# Altium PCB PCB1.PcbDoc
Units mil, origin at the board's own origin, x right, y up, seen from the top; angles counter-clockwise.
Board outline 3259.84 x 3858.27 mil, 2 copper layers (Top Layer, Bottom Layer); 9 components, 5 nets, 30 pads, 224 vias.
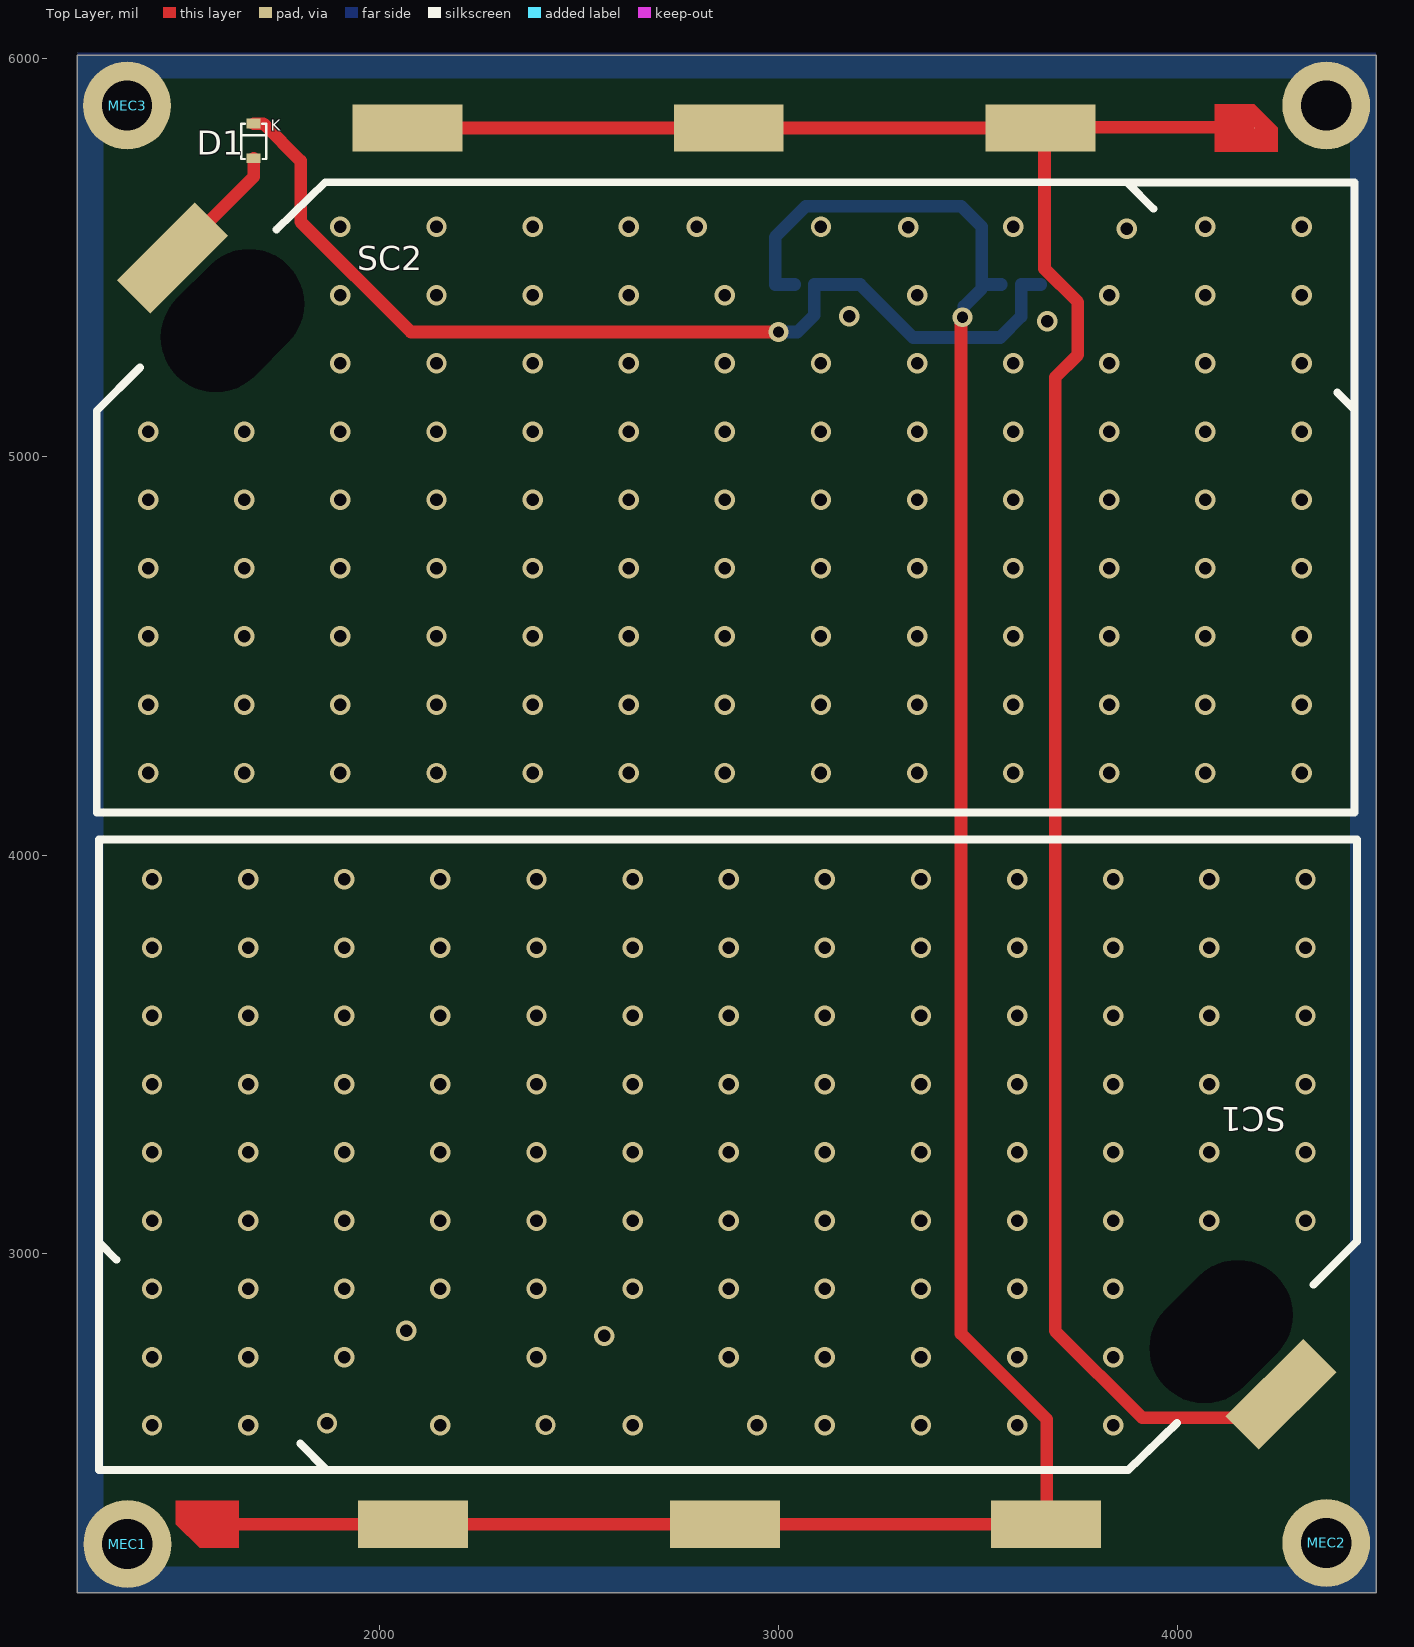
[diagram p0: Top Layer view]
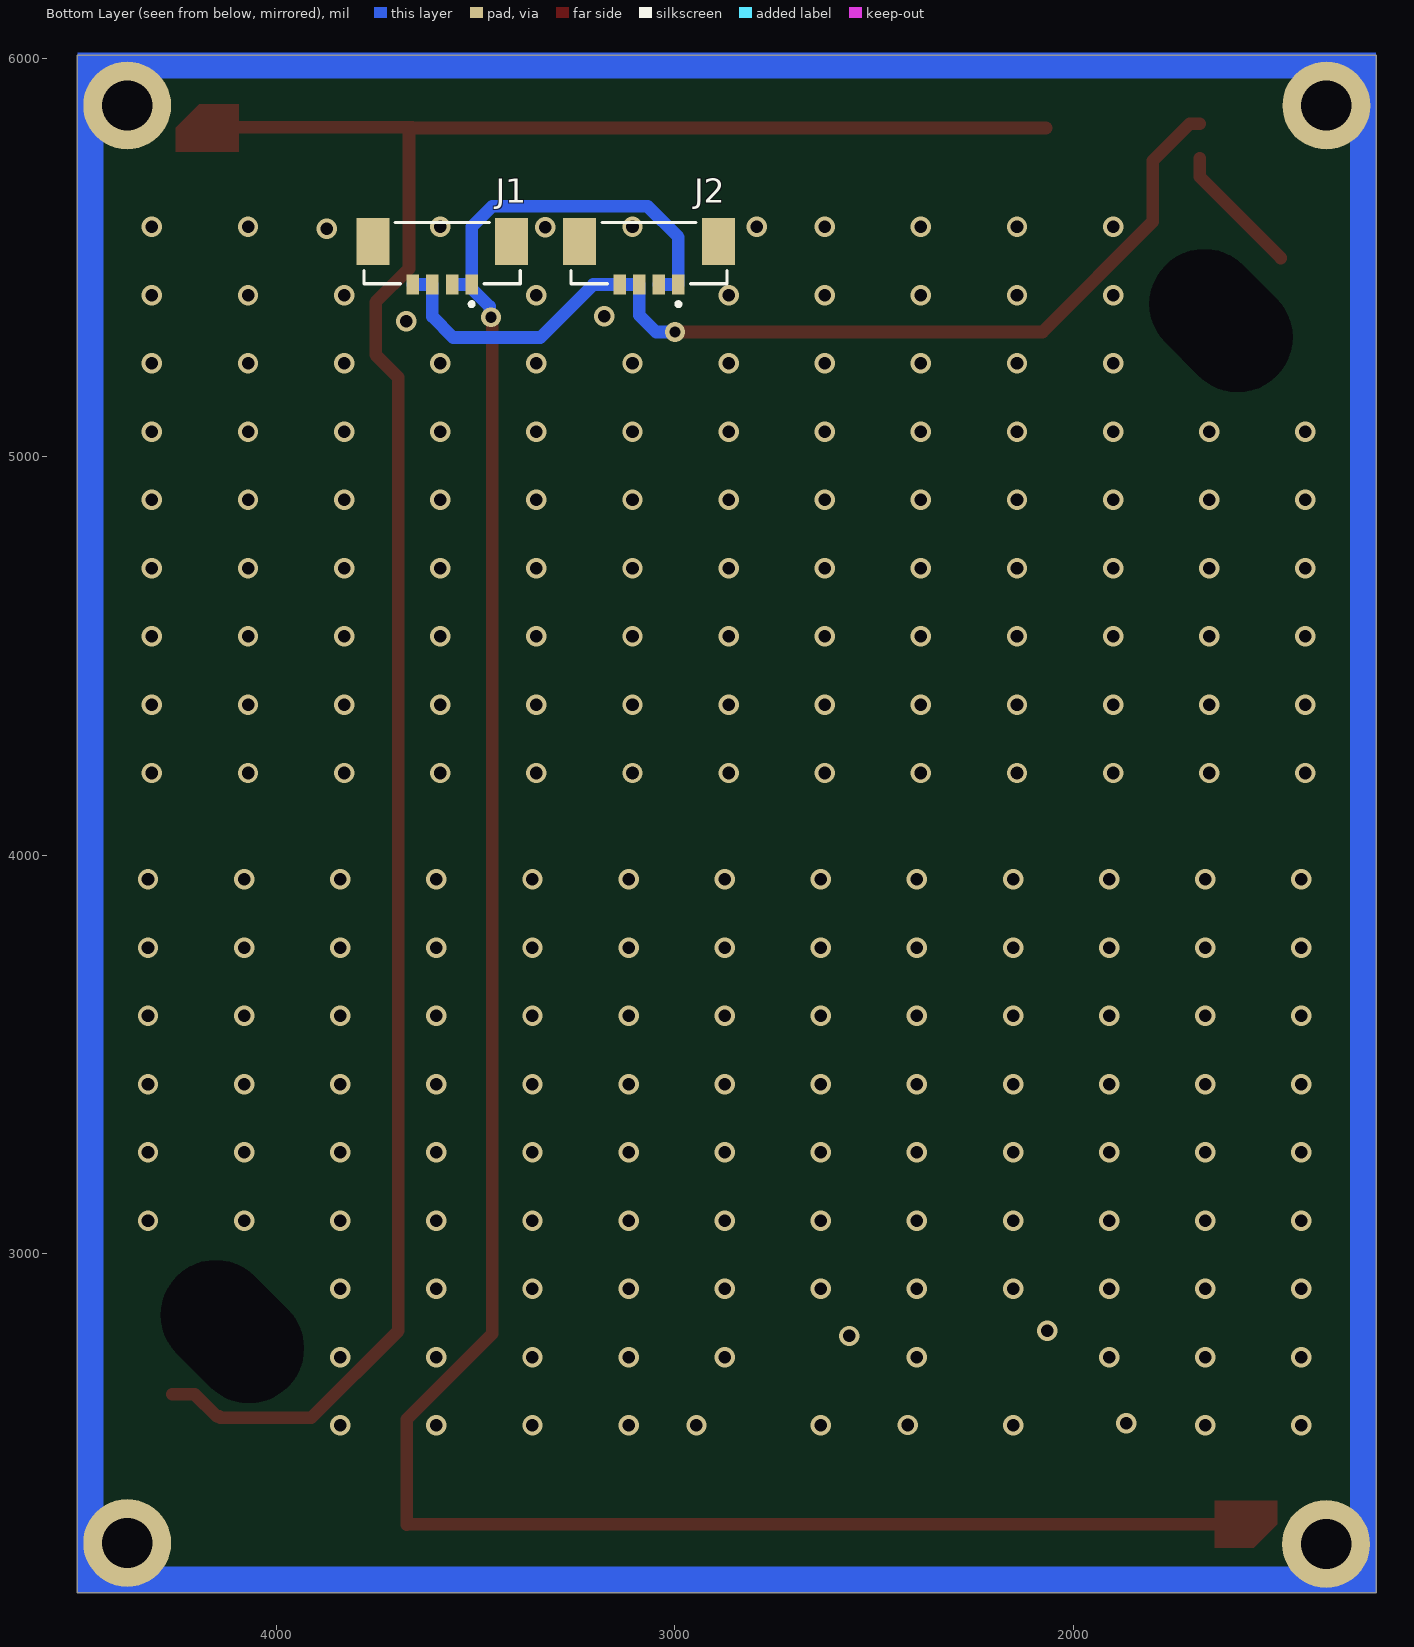
[diagram p1: Bottom Layer view, seen from below]
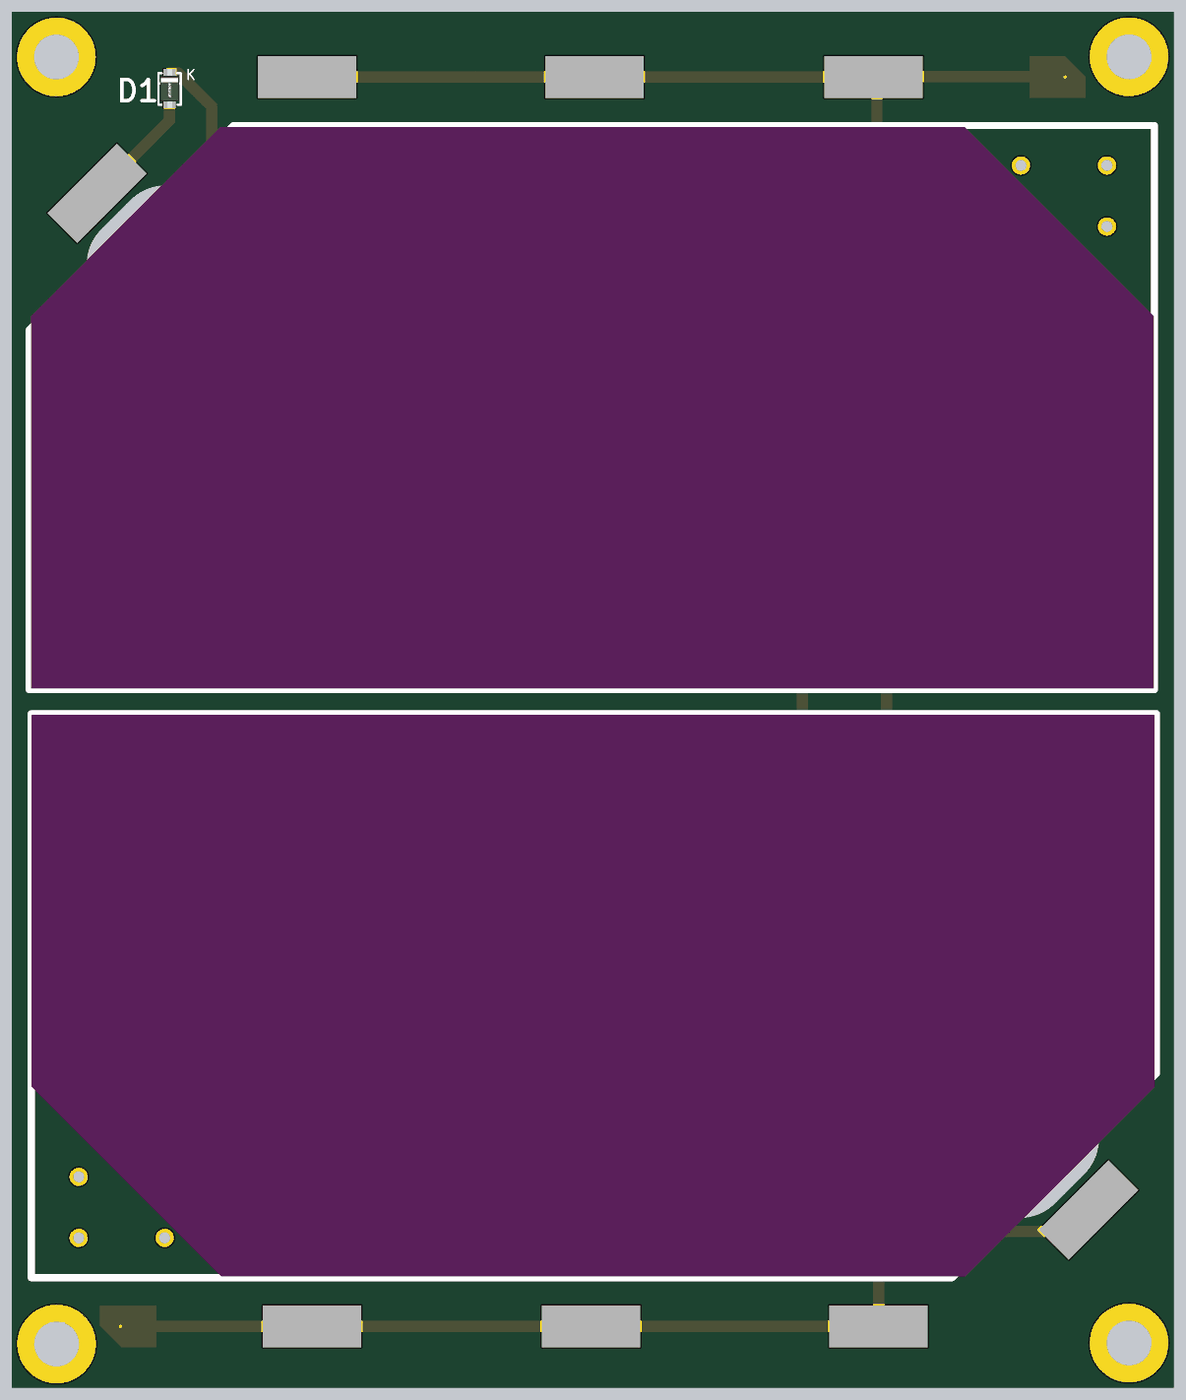
[diagram p2: 3D render of the assembled board from above, using the file's embedded part models]

## Layer stack, top to bottom
Top Solder: solder mask 0.4, Solder Resist, Dk 3.5
Top Layer: signal copper 1.4
Dielectric 1: dielectric 12.6, FR-4, Dk 4.8
Bottom Layer: signal copper 1.4
Bottom Solder: solder mask 0.4, Solder Resist, Dk 3.5

## Board outline
1240,2149.54 1240,6007.81 4499.84,6007.81 4499.84,2149.54

## Design rules (kind name [scope] priority, off if disabled: settings)
Clearance [All] p1: gap=10 ignorepadtopadclearanceinfootprint=FALSE except(0: Arc-Hole Track-Hole SMDPad-SMDPad SMDPad-Fill SMDPad-Poly SMDPad-Region SMDPad-Hole THPad-Hole Via-Hole Fill-Hole Poly-Hole Region-Hole Text-Hole)
ComponentClearance [All] p1: gap=0 collisioncheckmode=3 verticalgap=0 showdistances=FALSE donotcheckwithout3dbody=TRUE
PolygonConnect [All] p1: connectstyle=Relief reliefconductorwidth=10 reliefentries=4 polygonreliefangle="90 Angle" airgapwidth=10
RoutingVias [All] p1: holewidth=28 width=50 viastyle="Through Hole" minholewidth=28 minwidth=50 maxholewidth=28 maxwidth=50
SolderMaskExpansion [All] p1: expansion=4 istentingtop=FALSE
SupplyNets "Schematic Supply Nets_2" [InNet('INPUT_V-')] p1: voltage=0.000
SupplyNets "Schematic Supply Nets_1" [InNet('GND')] p2: voltage=0.000
SupplyNets "Schematic Supply Nets" [InNet('INPUT2_V+')] p3: voltage=0.000
Width [All] p1: maxlimit=31.5 minlimit=11.81 preferedwidth=13.78
29 further rules are at their usual default settings.

## Components (designator, comment, footprint, x,y, rotation, side; value= is the part's Value field where it differs from the comment)
D1 "SMD22WS-TP" SOD323F 1683.07,5790.35 r270 top
J1 "533980471" FP-533980471-MFG 3583.66,5510.83 r180 bottom
J2 "533980471" FP-533980471-MFG 3064.96,5510.83 r180 bottom
MEC1 "M3" HOLE6x6mm 1366.14,2272.18 r0 top
MEC2 "M3" HOLE6x6mm 4374.02,2275.13 r0 top
MEC3 "M3" HOLE6x6mm 1365.67,5880.94 r0 top
MEC4 "M3" HOLE6x6mm 4374.02,5881.43 r0 top
SC1 "5x8mm" SOLAR_CELL 4450.79,4039.37 r180 top
SC2 "5x8mm" SOLAR_CELL 1289.37,4107.28 r0 top

## Footprints (in the part's own frame and the unit in brackets; to place one, negate y for a bottom-side part, rotate by r counter-clockwise, add the part's x,y. Pads: shape width x height; smd on the part's side, far side on the other; paste and mask are expansions set on the pad)
FP-533980471-MFG [mm]
  rect 0.8x1.3 smd paste+0 mask+0: 1(1.875,-2) 2(0.625,-2) 3(-0.625,-2) 4(-1.875,-2)
  rect 2.1x3 smd paste+0 mask+0: 5(-4.425,0.75) 6(4.425,0.75)
  silkscreen extent -4.97,-3.37 4.97,1.95, body extent -5.07,-2.1 5.07,2.1, height 5.1
HOLE6x6mm [mm]
  round 5.6 hole 3.2: 0(0,0)
SOD323F [mm] "Diode SMD22WS-TP"
  rect 0.63x0.9 smd mask+0.05: 1(-1.15,0)
  rect 0.63x0.89 smd mask+0.05: 2(1.05,0)
  silkscreen extent -1.15,-0.8 1.1,0.8, body extent -1.45,-0.67 1.35,0.68, height 0.75
SOLAR_CELL [mm]
  round 0.025 smd: 1(73.8,43.625)
  rect 7x3 smd: 2(60.15,43.625) 3(40.275,43.625) 4(19.8,43.625)
  rect 7x3 smd rot 45: 5(4.83,35.34)
  round 0 hole 7 slot 10 at 45 deg unplated: ""(8.65,31.35)
  Top Layer region: 75.25,42.125 71.25,42.125 71.25,45.125 73.75,45.125 75.25,43.625
  silkscreen extent 0,0 80.16,40.16, body extent 0.12,0.08 80.13,40.08, height 0.22

## Part data
D1: library part DIODE_SCHOTTKY_20V_2A_SMD22WS-TP, "Diode Schottky 20 V 2A Surface Mount SOD-323", PartNumber=SMD22WS-TP
J1 J2: library part CMP-04776-000105-1, "CONN HEADER SMD 4POS 1.25MM", Ambient Temperature Range High=+105°C, Ambient Temperature Range Low=-40°C, Current Rating=1A, Manufacturer=Molex, Package=0, Temperature="-40°C to +105°C", Voltage Rating=125V, Automotive=No, Category=Conn, ComponentLink2Description=Datasheet, ComponentLink2URL=https://www.molex.com/pdm_docs/ps/PS-51021-024-001.pdf, Conn Gender=Male, Conn Orientation=Vertical, Contact Material=Tin, Device Class L1=Connectors, Device Class L2="Headers and Wire Housings", Device Class L3=unset, Digikey Description="CONN HEADER SMD 4POS 1.25MM", Footprint Url=https://www.molex.com/pdm_docs/sd/533980471_sd.pdf, Height=5.1mm, Lead Free=Yes, Manufacturer Part Number=533980471, Number Of Contacts=4, Number Of Rows=1, Octopart=https://octopart.com/53398-0471-molex-655296, Pitch=1.25mm, RoHS=TRUE, Standoff Height=0.05mm, Temperature Range High=+105°C, Temperature Range Low=-40°C
MEC1 MEC2 MEC3 MEC4: library part "M3 hole", "M3 hole"
SC1 SC2: library part "SOLAR CELL", Manufacturer="Yim Space", PDM Number=SC-3GA-3

## Via types
v1: diameter 51.18, hole 31.5, Top Layer to Bottom Layer, 222 vias
v2: diameter 50, hole 28, Top Layer to Bottom Layer, 2 vias

## Nets (pads, with @x,y where several pads share a name; then routed paths per layer and width w, separated by ;. In a path a pad name is that pad's centre, name@x,y a point inside that pad or via, vN(x,y) a via of type N, cw(c..) or ccw(c..) an arc to the next point about the centre after c; other vN are vias at no path point)
GND: MEC1.0 MEC2.0 MEC3.0 MEC4.0
INPUT2_V+: D1.1 J1.3 J1.4 J2.3 J2.4 | length 2531.9
  Top Layer w31.5: D1.1 1707.68,5835.63 1801.18,5742.13 1801.18,5589.57 2077.76,5312.99 v2(3000,5312.99)
  Bottom Layer w31.5: v2(3000,5312.99) 3047.24,5312.99 3089.57,5355.31 J2.3 J2.4 3204.72,5432.09 3337.6,5299.21 3556.1,5299.21 3608.27,5351.38 J1.3 J1.4
INPUT_V-: J1.1 J1.2 J2.1 J2.2 SC1.1 SC1.2 SC1.3 SC1.4 | length 6283.1
  Top Layer w31.5: SC1.1 SC1.2 SC1.3 SC1.4 3672.24,2320.87 3672.24,2585.63 3457.68,2800.2 3457.68,5346.42 v2(3461.22,5349.96)
  Bottom Layer w31.5: J2.2 J2.1 2991.14,5551.18 3068.07,5628.11 3458.5,5628.11 3509.84,5576.77 J1.1 ; v2(3461.22,5349.96) 3464.76,5353.5 3464.76,5377.16 3509.84,5422.24 J1.1 ; J1.2 J1.1
NetD1_2: D1.2 SC2.5 | length 334.7
  Top Layer w31.5: SC2.5 1683.07,5702.16 D1.2
NetSC1_5: SC1.5 SC2.1 SC2.2 SC2.3 SC2.4 | length 5884.6
  Top Layer w31.5: SC2.4 SC2.3 SC2.2 3667.09,5815.2 3667.09,5471.69 3750.98,5387.8 3750.98,5255.91 3694.02,5198.94 3694.02,2806.96 3912.4,2588.58 4139.93,2588.58 4143.72,2592.37 4149.11,2592.37 4204.79,2648.05 SC1.5 ; SC2.2@3659.09,5826.41 4193.27,5826.41
pads on no net: J1.5 J1.6 J2.5 J2.6 SC1. SC2.
copper on no net:
  other v1: 1428.15,2569.88 1669.29,2569.88 2151.58,2569.88 2633.86,2569.88 2945.87,2569.88 3116.14,2569.88 3357.28,2569.88 3598.43,2569.88 3839.57,2569.88 2415.35,2570.87 1867.13,2574.8 1428.15,2741.14 1669.29,2741.14 1910.43,2741.14 2392.72,2741.14 2875,2741.14 3116.14,2741.14 3357.28,2741.14 3598.43,2741.14 3839.57,2741.14 2562.99,2794.29 2065.95,2807.09 1428.15,2912.4 1669.29,2912.4 1910.43,2912.4 2151.58,2912.4 2392.72,2912.4 2633.86,2912.4 2875,2912.4 3116.14,2912.4 3357.28,2912.4 3598.43,2912.4 3839.57,2912.4 1428.15,3083.66 1669.29,3083.66 1910.43,3083.66 2151.58,3083.66 2392.72,3083.66 2633.86,3083.66 2875,3083.66 3116.14,3083.66 3357.28,3083.66 3598.43,3083.66 3839.57,3083.66 4080.71,3083.66 4321.85,3083.66 1428.15,3254.92 1669.29,3254.92 1910.43,3254.92 2151.58,3254.92 2392.72,3254.92 2633.86,3254.92 2875,3254.92 3116.14,3254.92 3357.28,3254.92 3598.43,3254.92 3839.57,3254.92 4080.71,3254.92 4321.85,3254.92 1428.15,3426.18 1669.29,3426.18 1910.43,3426.18 2151.58,3426.18 2392.72,3426.18 2633.86,3426.18 2875,3426.18 3116.14,3426.18 3357.28,3426.18 3598.43,3426.18 3839.57,3426.18 4080.71,3426.18 4321.85,3426.18 1428.15,3597.44 1669.29,3597.44 1910.43,3597.44 2151.58,3597.44 2392.72,3597.44 2633.86,3597.44 2875,3597.44 3116.14,3597.44 3357.28,3597.44 3598.43,3597.44 3839.57,3597.44 4080.71,3597.44 4321.85,3597.44 1428.15,3768.7 1669.29,3768.7 1910.43,3768.7 2151.58,3768.7 2392.72,3768.7 2633.86,3768.7 2875,3768.7 3116.14,3768.7 3357.28,3768.7 3598.43,3768.7 3839.57,3768.7 4080.71,3768.7 4321.85,3768.7 1428.15,3939.96 1669.29,3939.96 1910.43,3939.96 2151.58,3939.96 2392.72,3939.96 2633.86,3939.96 2875,3939.96 3116.14,3939.96 3357.28,3939.96 3598.43,3939.96 3839.57,3939.96 4080.71,3939.96 4321.85,3939.96 1418.31,4206.69 1659.45,4206.69 1900.59,4206.69 2141.73,4206.69 2382.87,4206.69 2624.02,4206.69 2865.16,4206.69 3106.3,4206.69 3347.44,4206.69 3588.58,4206.69 3829.72,4206.69 4070.87,4206.69 4312.01,4206.69 1418.31,4377.95 1659.45,4377.95 1900.59,4377.95 2141.73,4377.95 2382.87,4377.95 2624.02,4377.95 2865.16,4377.95 3106.3,4377.95 3347.44,4377.95 3588.58,4377.95 3829.72,4377.95 4070.87,4377.95 4312.01,4377.95 1418.31,4549.21 1659.45,4549.21 1900.59,4549.21 2141.73,4549.21 2382.87,4549.21 2624.02,4549.21 2865.16,4549.21 3106.3,4549.21 3347.44,4549.21 3588.58,4549.21 3829.72,4549.21 4070.87,4549.21 4312.01,4549.21 1418.31,4720.47 1659.45,4720.47 1900.59,4720.47 2141.73,4720.47 2382.87,4720.47 2624.02,4720.47 2865.16,4720.47 3106.3,4720.47 3347.44,4720.47 3588.58,4720.47 3829.72,4720.47 4070.87,4720.47 4312.01,4720.47 1418.31,4891.73 1659.45,4891.73 1900.59,4891.73 2141.73,4891.73 2382.87,4891.73 2624.02,4891.73 2865.16,4891.73 3106.3,4891.73 3347.44,4891.73 3588.58,4891.73 3829.72,4891.73 4070.87,4891.73 4312.01,4891.73 1418.31,5062.99 1659.45,5062.99 1900.59,5062.99 2141.73,5062.99 2382.87,5062.99 2624.02,5062.99 2865.16,5062.99 3106.3,5062.99 3347.44,5062.99 3588.58,5062.99 3829.72,5062.99 4070.87,5062.99 4312.01,5062.99 1900.59,5234.25 2141.73,5234.25 2382.87,5234.25 2624.02,5234.25 2865.16,5234.25 3106.3,5234.25 3347.44,5234.25 3588.58,5234.25 3829.72,5234.25 4070.87,5234.25 4312.01,5234.25 3674.21,5339.57 3177.17,5352.36 1900.59,5405.51 2141.73,5405.51 2382.87,5405.51 2624.02,5405.51 2865.16,5405.51 3347.44,5405.51 3829.72,5405.51 4070.87,5405.51 4312.01,5405.51 3873.03,5571.85 3324.8,5575.79 1900.59,5576.77 2141.73,5576.77 2382.87,5576.77 2624.02,5576.77 2794.29,5576.77 3106.3,5576.77 3588.58,5576.77 4070.87,5576.77 4312.01,5576.77

## Other copper
Bottom Layer:
  region net GND: 1306.1,2150.61 1306.1,6006.91 1241.39,6006.91 1241.39,2150.61
  rectangle net GND: 1241.14,2150.59 4499.02,2215.55
  rectangle net GND: 1241.14,5948.82 4499.02,6013.78
  region net GND: 4499.02,2150.59 4499.02,6006.89 4434.06,6006.89 4434.06,2150.59

## Silkscreen, mask and mechanical layers (free items; w line width, h text height)
Mechanical 16:
  drawing of 38 lines, arcs and shapes, not listed
  text "1" at 1427,7464.54 h70
  text "2" at 4287,7464.54 h70
  text "3" at 7167,7464.54 h70
  text "4" at 10037,7464.54 h70
  text "Fabrication specifications:" at 6343.94,7022.02 h121.88
  text "A" at 75,6558.54 h70
  text "A" at 11375,6558.54 h70
  text "- Copper base 1OZ:  / - PCB Material: Prepeg FR4-Standard / - PCB Tickness: 1.6mm / - PCB Surface: HASL (with lead)" at 6343.7,6353.36 h68.12
  text "- Silkscreen Color: White (top and bottom) / - Soldermask Color: Green / - Vias: Force Complete Tenting / - Special: Stack-up (herein included)" at 8615.35,6353.36 h68.12
  text "Assembly specifications:" at 6354.77,6117.3 h121.88
  text "- Solder composition: Include lead / - Fiducials: 3 top and 3 bottom avaliable / - Check BOM for not placed components" at 6354.53,5448.24 h68.12
  text "B" at 75,4666.54 h70
  text "B" at 11375,4666.54 h70
  text "C" at 75,2756.54 h70
  text "C" at 11375,2756.54 h70
  text "SpaceLab - Federal University of Santa Catarina" at 7795.28,1023.17 h98.43
  text "D" at 75,866.54 h70
  text "D" at 11375,866.54 h70
  text "Project:" at 7795.28,846 h98.43
  text "EPS2" at 8110.24,846 h98.43
  text "Layer:" at 7795.28,649.15 h98.43
  text "Designed by:" at 7795.28,452.3 h98.43
  text "Project Code:" at 10078.74,452.3 h98.43
  text "EPS2" at 10649.61,452.3 h98.43
  text "=DesigndBy" at 8343.54,451 h98.43
  text "=Revision" at 9292.36,258.09 h98.43
  text "Date:" at 7795.28,255.45 h98.43
  text "'.Print_Date'" at 8031.5,255.45 h98.43
  text "Version:" at 8937.01,255.45 h98.43
  text "Size:" at 10078.74,255.45 h98.43
  text "A4" at 10314.96,255.45 h98.43
  text "1" at 1427,64.54 h70
  text "2" at 4287,64.54 h70
  text "3" at 7167,64.54 h70
  text "4" at 10037,64.54 h70

## Text inside footprints (layer, text, board x,y; h text height)
D1: Top Overlay "K" at 1726.38,5817.91 h27.56